# Altium PCB DRLVoltage.PcbDoc
Units mm, origin at the board's own origin, x right, y up, seen from the top; angles counter-clockwise.
Board outline 152.4 x 101.6 mm, 2 copper layers (Top Layer, Bottom Layer); 12 components, 9 nets, 37 pads, 0 vias.
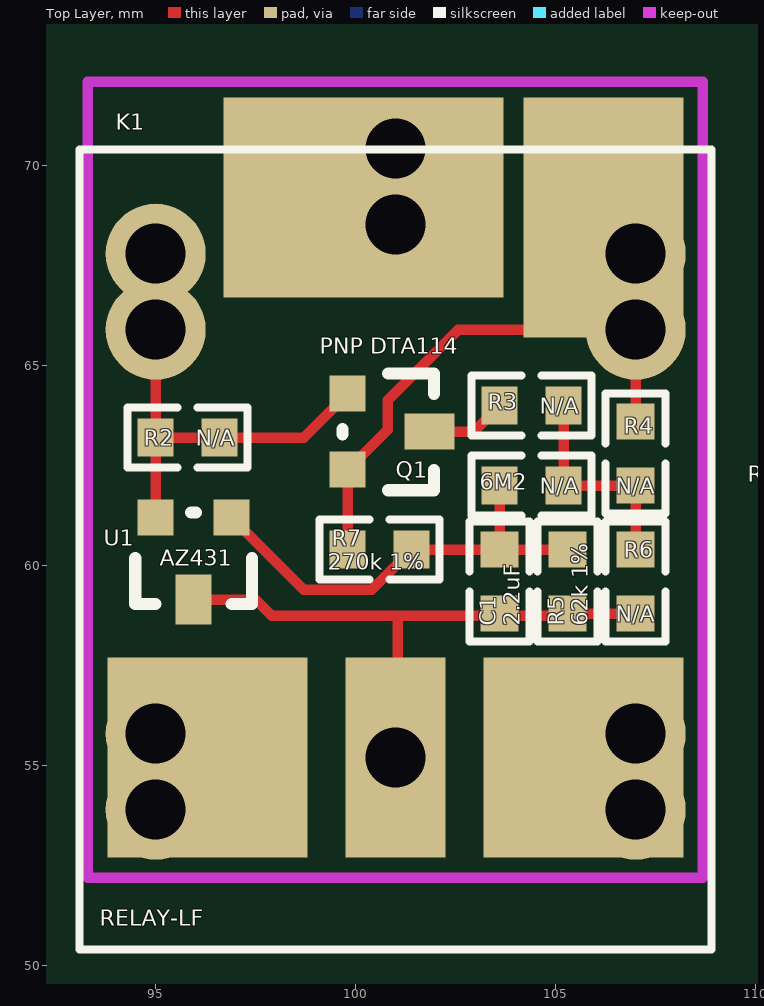
[diagram p0: Top Layer view]
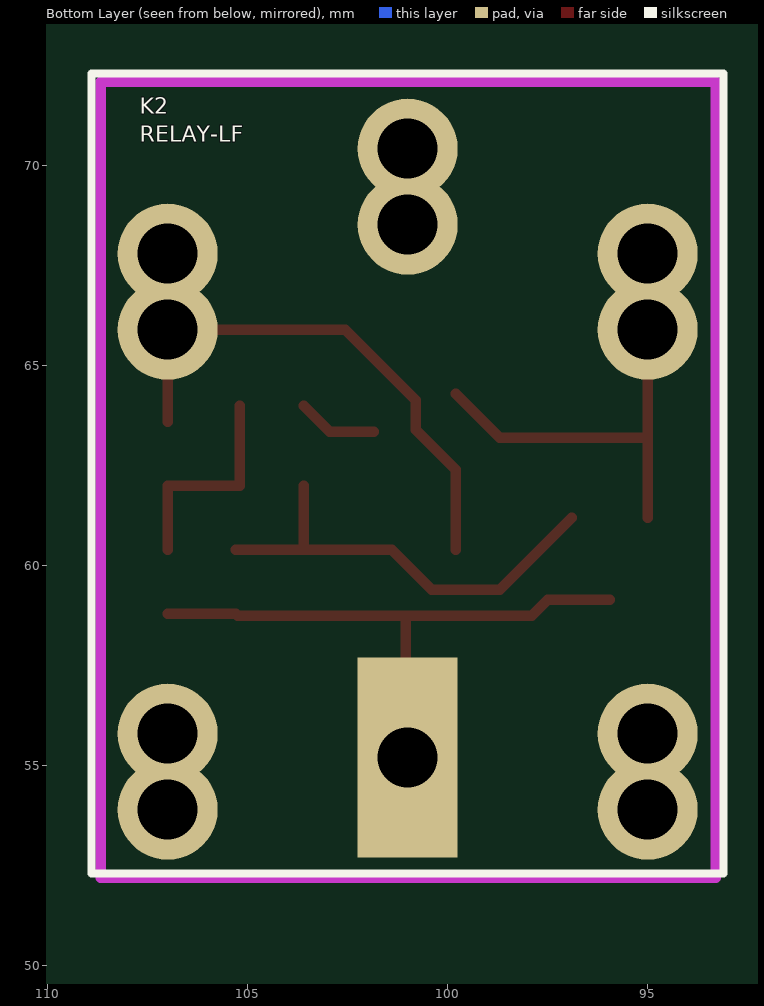
[diagram p1: Bottom Layer view, seen from below]

## Layer stack, top to bottom
Top Layer: signal copper 0.0356
Dielectric: dielectric 0.32, FR-4, Dk 4.8
Bottom Layer: signal copper 0.0356

## Board outline
25.4,25.4 177.8,25.4 177.8,127 25.4,127

## Design rules (kind name [scope] priority, off if disabled: settings)
Clearance [All] p1: gap=0.254
ComponentClearance [All] p1 off: gap=0 collisioncheckmode=3 verticalgap=0.254 showdistances=FALSE
PolygonConnect [All] p1: connectstyle=Relief reliefconductorwidth=0.254 reliefentries=4 polygonreliefangle="90 Angle"
RoutingVias [All] p1: holewidth=0.711 width=1.27 viastyle="Through Hole" minholewidth=0.711 minwidth=1.27 maxholewidth=0.711 maxwidth=1.27
SilkscreenOverComponentPads [All] p1: minsilkscreentomaskgap=0.254
SolderMaskExpansion [All] p1: expansion=0.102
Width [All] p1: maxlimit=0.254 minlimit=0.254 preferedwidth=0.254
26 further rules are at their usual default settings.

## Classes and differential pairs
component class DRLVoltage: K1 R5 R7

## Components (designator, comment, footprint, x,y, rotation, side; value= is the part's Value field where it differs from the comment)
C1 "2.2uF" 0603 103.6,59.6 r270 top
K1 "RELAY-LF" RELAY5PIN 95,65.9 r0 top
K2 "RELAY-LF" RELAY5PIN 107,67.8 r180 bottom
Q1 "PNP DTA114" sot-23 99.8,64.3 r270 top
R1 "N/A" 0603 104.4,62 r180 top
R2 "N/A" 0603 95.8,63.2 r180 top
R3 "6M2" 0603 104.4,64 r0 top
R4 "N/A" 0603 107,62.8 r270 top
R5 "62k 1%" 0603 105.3,59.6 r270 top
R6 "N/A" 0603 107,59.6 r270 top
R7 "270k 1%" 0603 100.6,60.4 r0 top
U1 "AZ431" SOT-23 96.9,61.2 r180 top

## Footprints (in the part's own frame and the unit in brackets; to place one, negate y for a bottom-side part, rotate by r counter-clockwise, add the part's x,y. Pads: shape width x height; smd on the part's side, far side on the other; paste and mask are expansions set on the pad)
0603 [mm]
  rect 0.9x0.95 smd: 1(-0.8,0) 2(0.8,0)
  silkscreen extent -1.5,-0.75 1.5,0.75
RELAY5PIN [mm]
  round 2.5 hole 1.5: 1(6,2.625) 2(0,-12) 3(12,-12) 4(12,0) 5(0,0)
  silkscreen extent -1.9,-15.5 13.9,4.5
sot-23 [mm]
  rect 0.9x0.9 smd: 1(0,0) 3(1.9,0)
  rect 0.9x1.25 smd: 2(0.95,2.05)
  silkscreen extent -0.51,-0.13 2.41,2.16
SOT-23 [mm]
  rect 0.9x0.9 smd: 1(0,0) 3(1.9,0)
  rect 0.9x1.25 smd: 2(0.95,2.05)
  silkscreen extent -0.51,-0.13 2.41,2.16

## Part data
C1: library part CAP, "Capacitor"
K1 K2: library part RELAY-SPDT
Q1: library part PNP, "PNP Bipolar Transistor"
R1 R2 R3 R4 R5 R6 R7: library part Res1, "Resistor"
U1: library part TL431

## Free pads (board coordinates)
  rect 2.5x5 hole 1.5: 0(101,55.2)
  rect 5x5 smd: 1(96.3,55.2) 1(105.7,55.2)
  rect 7x5 smd: 1(100.2,69.2)
  rect 4x6 smd: 1(106.2,68.7)

## Nets (pads, with @x,y where several pads share a name; then routed paths per layer and width w, separated by ;. In a path a pad name is that pad's centre, name@x,y a point inside that pad or via, vN(x,y) a via of type N, cw(c..) or ccw(c..) an arc to the next point about the centre after c; other vN are vias at no path point)
CATHODE: K1.5 K2.4 Q1.1 R2.1 R2.2 U1.3 | length 12.6
  Top Layer w0.254: U1.3 R2.2 ; K2.4@95,68.5 K1.5 R2.2 ; Q1.1 98.7,63.2 R2.1 R2.2
L: K1.2 K2.3 pad.1@96.3,55.2
NetQ1_2: Q1.2 R3.1 | length 2
  Top Layer w0.254: Q1.2 102.95,63.35 R3.1
NetR1_1: R1.1 R3.2 R4.2 R6.1 | length 5.4
  Top Layer w0.254: R3.2 R1.1 R4.2 R6.1
PGND: C1.2 pad.0 R5.2 R6.2 U1.2 | length 14.7
  Top Layer w0.254: U1.2 97.5,59.15 97.9,58.75 101.05,58.75 ; pad.0@101.05,55.25 101.05,58.75 ; R5.2@105.25,58.75 101.05,58.75 ; R5.2 R6.2
POWER: K1.1 K2.1 pad.1@100.2,69.2
R: K1.3 K2.2 pad.1@105.7,55.2
REF: C1.1 R1.2 R5.1 R7.2 U1.1 | length 11.2
  Top Layer w0.254: U1.1 98.7,59.4 100.4,59.4 R7.2 C1.1 ; R1.2 C1.1 ; R5.1 C1.1
VCC: K1.4 K2.5 pad.1@106.2,68.7 Q1.3 R4.1 R7.1 | length 16
  Top Layer w0.254: R7.1 Q1.3 100.8,63.4 100.8,64.137 102.563,65.9 K1.4 ; R4.1 K1.4 ; pad.1@107,68.5 K2.5 K1.4

## Keep-outs
Keep-Out Layer:
  lines w0.254: 93.3,52.2 93.3,72.1 108.675,72.1 108.675,52.2 93.3,52.2

## Silkscreen, mask and mechanical layers (free items; w line width, h text height)
Top Overlay:
  text "N/A" at 104.6,63.8 h0.4